# Altium PCB AuxBoard030624.PcbDoc
Units mm, origin at the board's own origin, x right, y up, seen from the top; angles counter-clockwise.
Board outline 193.93 x 90.42 mm, 2 copper layers (Top Layer, Bottom Layer); 177 components, 141 nets, 489 pads, 90 vias.
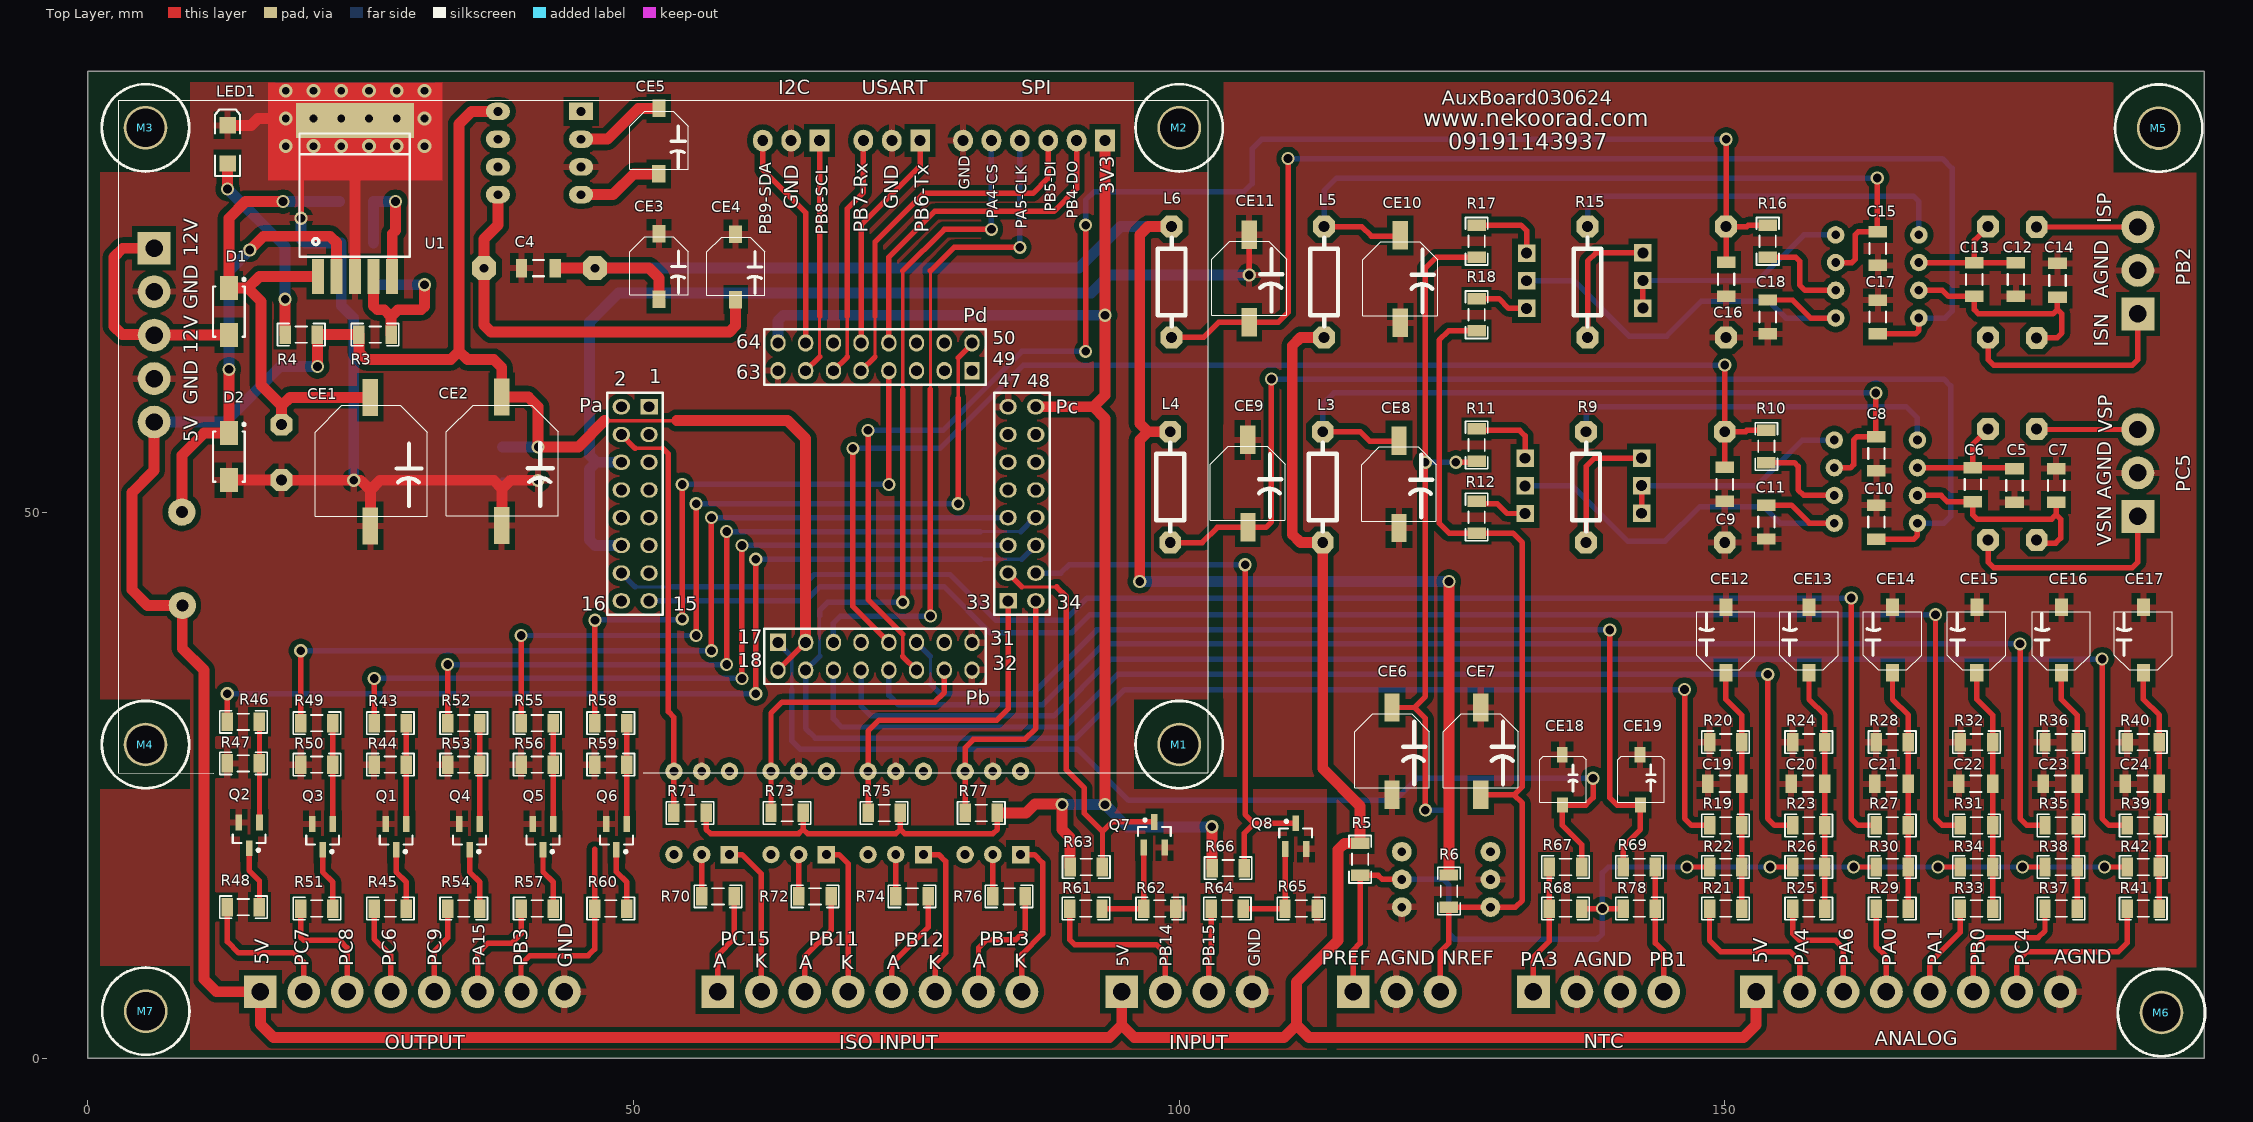
[diagram p0: Top Layer view]
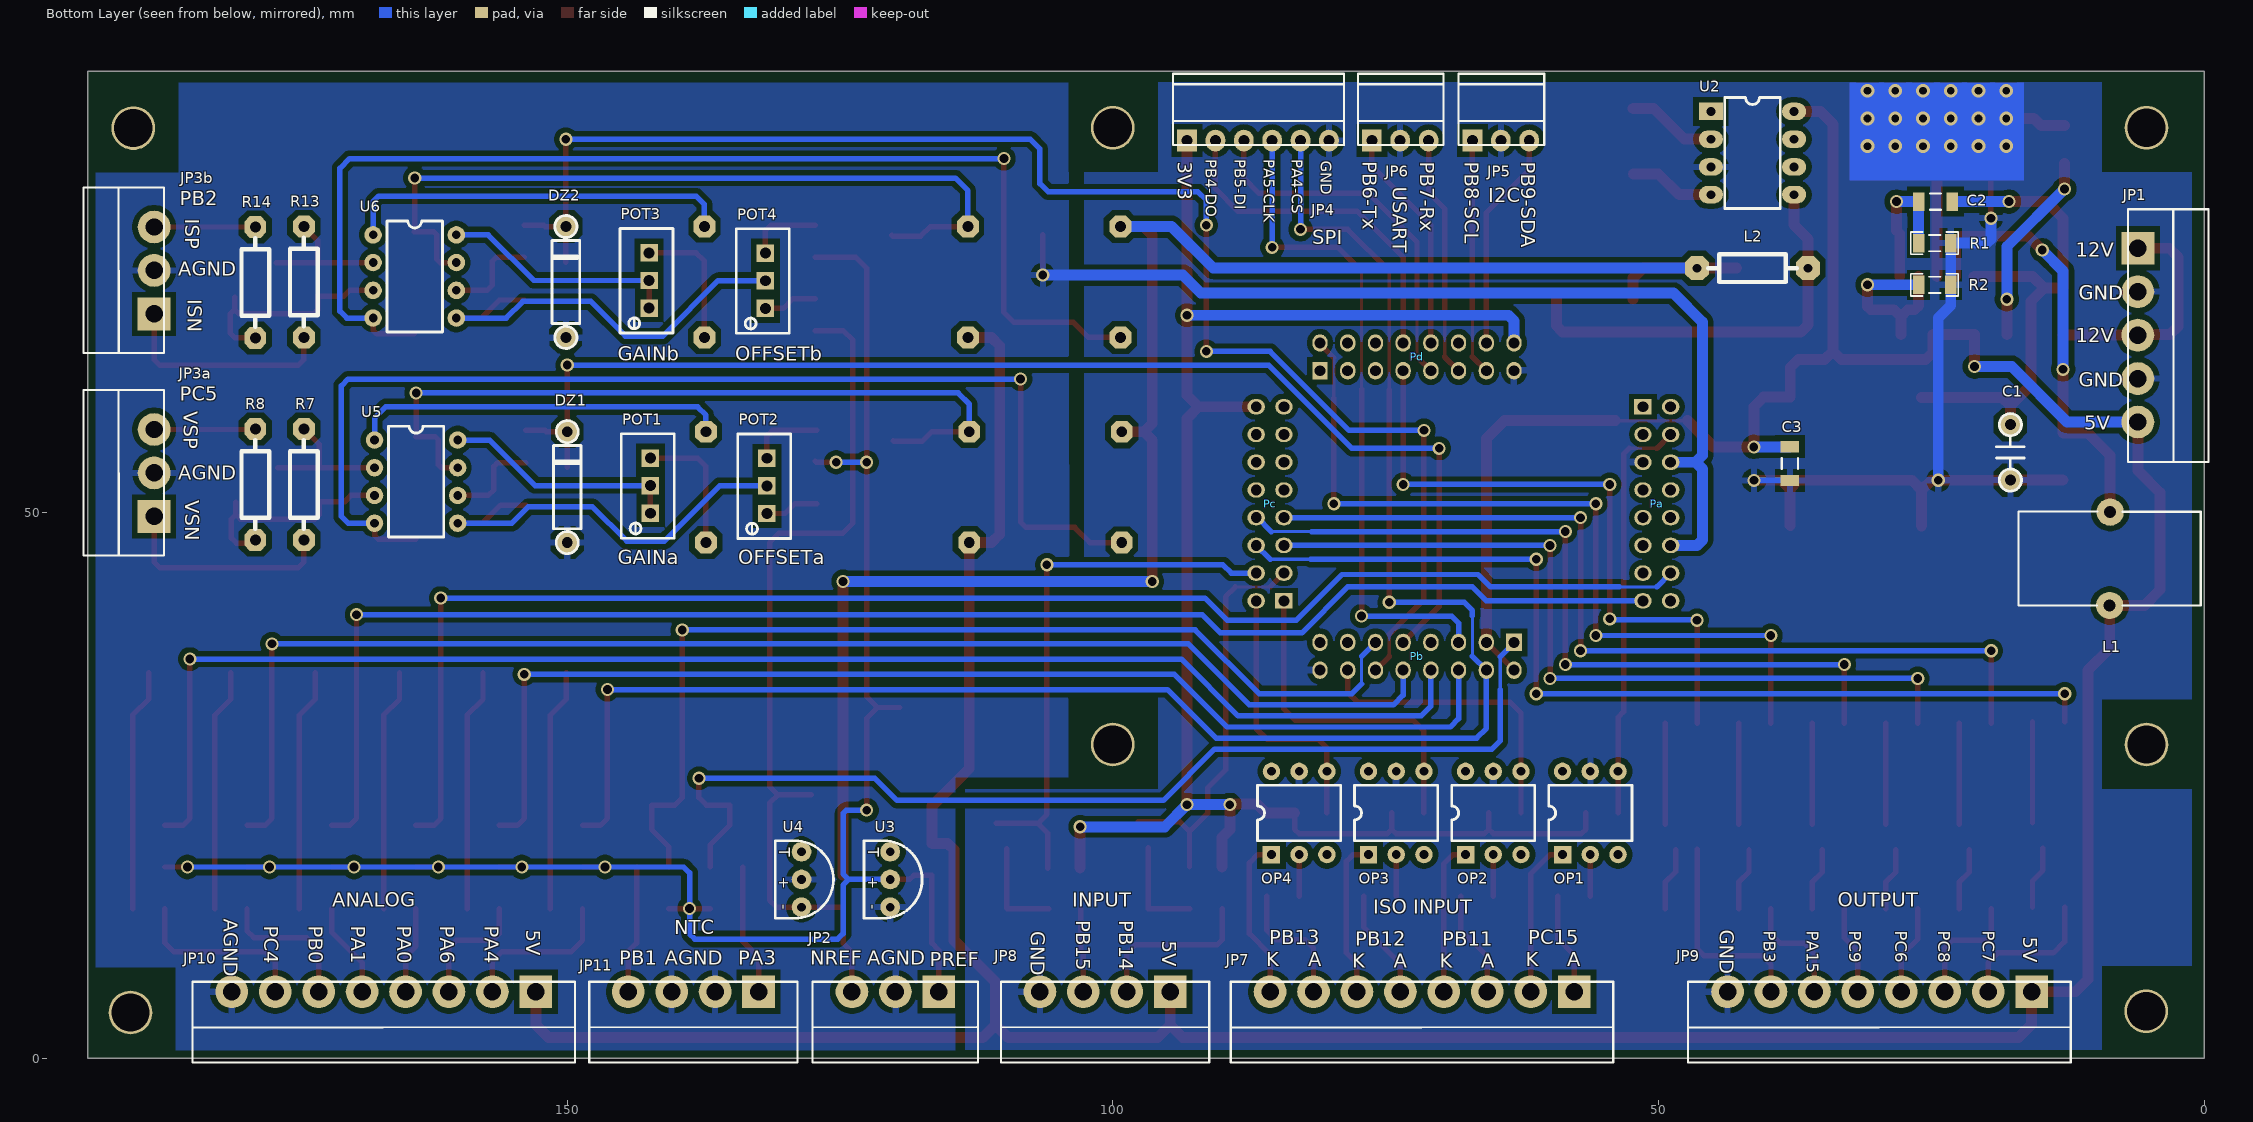
[diagram p1: Bottom Layer view, seen from below]
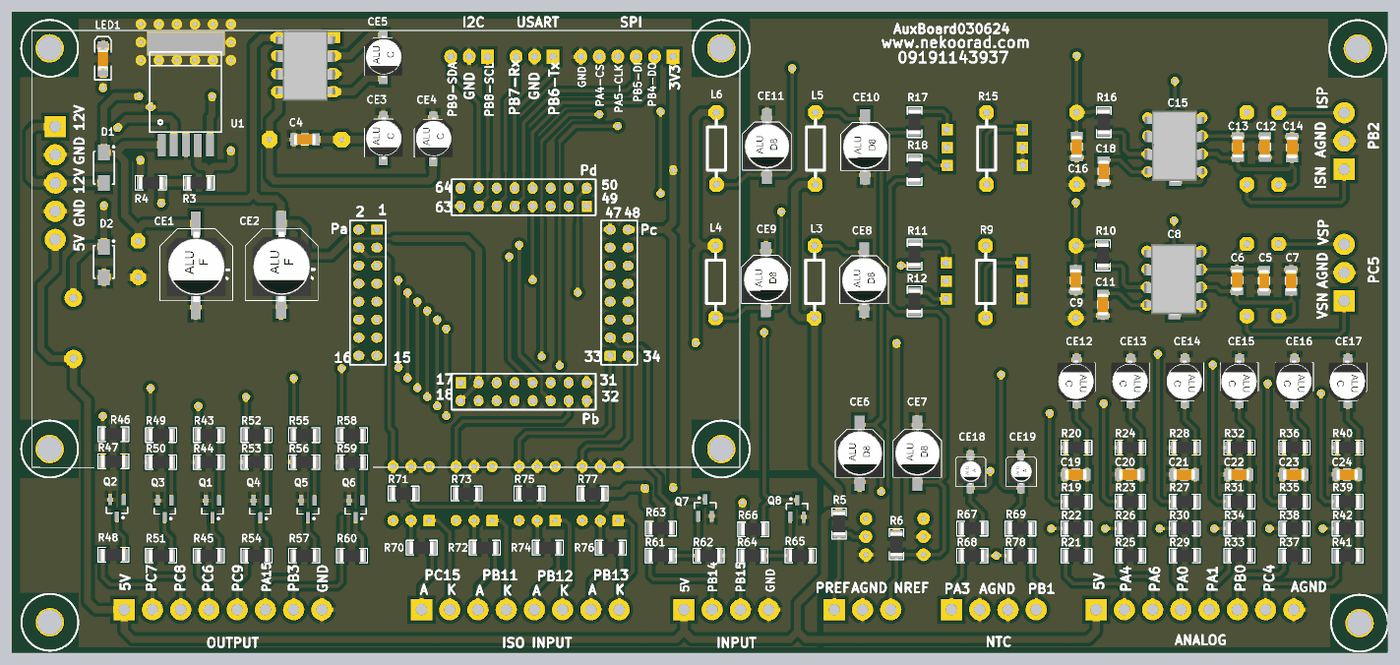
[diagram p2: 3D render of the assembled board from above, using the file's embedded part models]

## Layer stack, top to bottom
Top Solder: solder mask 0.0102, Solder Resist, Dk 3.5
Top Layer: signal copper 0.0356
Dielectric 1: dielectric 0.32, FR-4, Dk 4.8
Bottom Layer: signal copper 0.0356
Bottom Solder: solder mask 0.0102, Solder Resist, Dk 3.5

## Board outline
0,0 0,90.424 193.929,90.424 193.929,0

## Design rules (kind name [scope] priority, off if disabled: settings)
Clearance Poly [All vs InPolygon] p1: gap=0.5 ignorepadtopadclearanceinfootprint=FALSE
Clearance [All] p2: gap=0.4 ignorepadtopadclearanceinfootprint=FALSE
PlaneClearance [All] p1: clearance=0.5
PlaneConnect [All] p1: planeconnectstyle=Relief reliefexpansion=0.508 reliefentries=4 reliefconductorwidth=0.6 reliefairgap=0.5
PolygonConnect [All] p1: connectstyle=Relief reliefconductorwidth=0.6 reliefentries=4 polygonreliefangle="90 Angle" airgapwidth=0.5
RoutingVias [All] p1: holewidth=0.711 width=1.27 viastyle="Through Hole" minholewidth=0.711 minwidth=1.27 maxholewidth=0.711 maxwidth=1.27
SolderMaskExpansion [All] p1: expansion=0.102 istentingtop=FALSE
Width [All] p1: maxlimit=1 minlimit=0.2 preferedwidth=0.5 minimp=50.000000 maximp=50.000000 favimp=50.000000
28 further rules are at their usual default settings.

## Components (designator, comment, footprint, x,y, rotation, side; value= is the part's Value field where it differs from the comment)
C1 "100N" C2P 17.78,58.048 r270 bottom
C2 "100N" SMD_CAP_1206. 24.642,78.486 r0 bottom
C3 "100N" SMD_CAP_1206. 37.973,54.483 r270 bottom
C4 "100N" SMD_CAP_1206. 41.3,72.39 r180 top
C5 "1N" SMD_CAP_1206. 176.53,52.476 r270 top
C6 "10N" SMD_CAP_1206. 172.72,52.553 r270 top
C7 "1N" SMD_CAP_1206. 180.34,52.476 r90 top
C8 "100N" SMD_CAP_1206. 163.883,55.396 r90 top
C9 "100N" SMD_CAP_1206. 149.987,52.578 r270 top
C10 "100N" SMD_CAP_1206. 163.883,49.122 r90 top
C11 "100N" SMD_CAP_1206. 153.797,49.124 r270 top
C12 "1N" SMD_CAP_1206. 176.657,71.349 r270 top
C13 "10N" SMD_CAP_1206. 172.847,71.349 r270 top
C14 "1N" SMD_CAP_1206. 180.467,71.272 r90 top
C15 "100N" SMD_CAP_1206. 164.01,74.192 r90 top
C16 "100N" SMD_CAP_1206. 150.114,71.374 r270 top
C17 "100N" SMD_CAP_1206. 164.01,67.918 r90 top
C18 "100N" SMD_CAP_1206. 153.924,67.92 r270 top
C19 "ND" SMD_CAP_1206. 149.991,25.146 r180 top
C20 "ND" SMD_CAP_1206. 157.611,25.146 r180 top
C21 "ND" SMD_CAP_1206. 165.26,25.146 r180 top
C22 "ND" SMD_CAP_1206. 172.978,25.146 r180 top
C23 "ND" SMD_CAP_1206. 180.725,25.146 r180 top
C24 "ND" SMD_CAP_1206. 188.247,25.146 r180 top
CE1 "470M/25" CAP-E-6 26.068,51.018 r0 top
CE2 "1000M/16" CAP-E-6 38.1,51.054 r0 top
CE3 "10M/25" CAP-E-3 52.414,70.651 r0 top
CE4 "10M/25" CAP-E-3 59.436,70.612 r0 top
CE5 "10M/25" CAP-E-3 52.399,82.126 r0 top
CE6 "47M" CAP-E-4 119.507,25.84 r0 top
CE7 "47M" CAP-E-4 127.635,25.84 r0 top
CE8 "47M" CAP-E-4 120.142,50.292 r0 top
CE9 "47M" CAP-E-4 106.299,50.351 r0 top
CE10 "47M" CAP-E-4 120.269,69.088 r0 top
CE11 "47M" CAP-E-4 106.426,69.147 r0 top
CE12 "ND" CAP-E-3 150.02,40.206 r180 top
CE13 "ND" CAP-E-3 157.64,40.206 r180 top
CE14 "ND" CAP-E-3 165.289,40.206 r180 top
CE15 "ND" CAP-E-3 173.007,40.206 r180 top
CE16 "ND" CAP-E-3 180.754,40.206 r180 top
CE17 "ND" CAP-E-3 188.276,40.206 r180 top
CE18 "1M" CAP-E-2 135.189,24.423 r0 top
CE19 "1M" CAP-E-2 142.33,24.423 r0 top
D1 "schottky" SMA-M 12.954,68.403 r270 top
D2 "schottky" SMA-M 12.954,55.118 r270 top
DZ1 "3V" D4P 149.987,47.244 r270 bottom
DZ2 "3V" D4P 150.114,66.04 r270 bottom
JP1 "DC_SUP" "dsip 5 right" 6.096,66.253 r180 bottom
JP2 "Ref" "dsip 3 right" 123.952,6.096 r270 bottom
JP3a "V/A Signal" "dsip 3 right" 187.833,57.658 r0 bottom
JP3b "V/A Signal" "dsip 3 right" 187.833,76.21 r0 bottom
JP4 "SPI" "SIP 6 Right" 93.204,84.074 r270 bottom
JP5 "I2C" "SIP 3 Right" 67.107,83.947 r270 bottom
JP6 "UART" "SIP 3 Right" 76.327,83.947 r270 bottom
JP7 "ISO DIN" "dsip 8 right" 57.763,6.071 r270 bottom
JP8 "DIN" "dsip 4 right" 102.727,6.096 r270 bottom
JP9 "DOUT" "dsip 8 right" 15.853,6.071 r270 bottom
JP10 "Analog" "dsip 8 right" 152.886,6.071 r270 bottom
JP11 "NTC" "dsip 4 right" 140.444,6.096 r270 bottom
L1 "100UH" INDUCTOR-ylw 0.401,49.893 r0 bottom
L2 "100UH" r4p#1 36.322,72.39 r270 bottom
L3 "100UH" r4p#2 113.157,47.244 r180 top
L4 "100UH" r4p#2 99.187,57.404 r0 top
L5 "100UH" r4p#2 113.284,66.04 r180 top
L6 "100UH" r4p#2 99.314,76.2 r0 top
LED1 "Red" LED_SMD_1206 15.048,83.815 r90 top
M1 "Comment" Stud-hole 100.006,28.745 r0 top locked value=DNP/MH
M2 "Comment" Stud-hole 100.006,85.245 r0 top locked value=DNP/MH
M3 "Comment" Stud-hole 5.306,85.245 r0 top locked value=DNP/MH
M4 "Comment" Stud-hole 5.306,28.745 r0 top locked value=DNP/MH
M5 "Comment" Stud-hole 189.738,85.217 r0 top value=DNP/MH
M6 "Comment" Stud-hole 189.992,4.191 r0 top value=DNP/MH
M7 "Comment" Stud-hole 5.334,4.318 r0 top value=DNP/MH
OP1 "4N28" DIP6 58.801,18.669 r90 bottom
OP2 "4N28" DIP6 67.691,18.669 r90 bottom
OP3 "4N28" DIP6 76.581,18.669 r90 bottom
OP4 "4N28" DIP6 85.471,18.669 r90 bottom
Pa "Header 8X2" HDR2X8#1 51.435,59.69 r270 bottom locked
Pb "Header 8X2" HDR2X8#2 63.246,38.1 r0 bottom locked
Pc "Header 8X2" HDR2X8#1 84.328,41.91 r90 bottom locked
Pd "Header 8X2" HDR2X8#1 81.026,62.992 r180 bottom locked
POT1 "ND" "pot multi turn" 142.367,49.931 r180 bottom
POT2 "ND" "pot multi turn" 131.699,49.911 r180 bottom
POT3 "ND" "pot multi turn" 142.494,68.727 r180 bottom
POT4 "ND" "pot multi turn" 131.826,68.707 r180 bottom
Q1 "2N2222" 2N2222 28.36,21.988 r180 top
Q2 "2N2222" 2N2222 14.898,22.115 r180 top
Q3 "2N2222" 2N2222 21.629,21.988 r180 top
Q4 "2N2222" 2N2222 35.091,21.988 r180 top
Q5 "2N2222" 2N2222 41.822,21.988 r180 top
Q6 "2N2222" 2N2222 48.553,21.988 r180 top
Q7 "2N2222" 2N2222 97.624,18.779 r0 top
Q8 "2N2222" 2N2222 110.578,18.652 r0 top
R1 "10K%" RES_1206 24.68,73.795 r180 bottom
R2 "2K2%" RES_1206 24.68,69.985 r180 bottom
R3 "47K%" RES_1206 26.374,65.413 r0 top
R4 "4K7%" RES_1206 19.542,67.175 r180 top
R5 "270R" RES_1206 117.467,18.275 r90 top
R6 "270R" RES_1206 125.595,15.354 r90 top
R7 "10K%" R4P 174.117,47.498 r0 bottom
R8 "10K%" R4P 178.562,57.658 r180 bottom
R9 "ND" R4P 137.287,57.404 r0 top
R10 "1K%" RES_1206 152.916,56.02 r270 top
R11 "ND" RES_1206 128.135,56.219 r90 top
R12 "ND" RES_1206 126.373,49.543 r270 top
R13 "10K%" R4P 174.117,66.04 r0 bottom
R14 "10K%" R4P 178.562,76.159 r180 bottom
R15 "ND" R4P 137.414,76.2 r0 top
R16 "1K%" RES_1206 153.043,74.816 r270 top
R17 "ND" RES_1206 128.135,74.888 r90 top
R18 "ND" RES_1206 126.373,68.085 r270 top
R19 "1K%" RES_1206 150.101,20.455 r0 top
R20 "ND" RES_1206 150.101,28.075 r0 top
R21 "ND" RES_1206 150.029,14.597 r180 top
R22 "ND" RES_1206 150.101,16.645 r0 top
R23 "1K%" RES_1206 157.721,20.455 r0 top
R24 "ND" RES_1206 157.721,28.075 r0 top
R25 "ND" RES_1206 157.649,14.597 r180 top
R26 "ND" RES_1206 157.721,16.645 r0 top
R27 "1K%" RES_1206 165.37,20.455 r0 top
R28 "ND" RES_1206 165.37,28.075 r0 top
R29 "ND" RES_1206 165.298,14.597 r180 top
R30 "ND" RES_1206 165.37,16.645 r0 top
R31 "1K%" RES_1206 173.088,20.455 r0 top
R32 "ND" RES_1206 173.088,28.075 r0 top
R33 "ND" RES_1206 173.016,14.597 r180 top
R34 "ND" RES_1206 173.088,16.645 r0 top
R35 "1K%" RES_1206 180.835,20.455 r0 top
R36 "ND" RES_1206 180.835,28.075 r0 top
R37 "ND" RES_1206 180.763,14.597 r180 top
R38 "ND" RES_1206 180.835,16.645 r0 top
R39 "1K%" RES_1206 188.357,20.455 r0 top
R40 "ND" RES_1206 188.357,28.075 r0 top
R41 "ND" RES_1206 188.285,14.597 r180 top
R42 "ND" RES_1206 188.357,16.645 r0 top
R43 "4K7" RES_1206 27.771,29.824 r0 top
R44 "2K2" RES_1206 27.699,27.776 r180 top
R45 "ND" RES_1206 27.699,14.597 r180 top
R46 "4K7" RES_1206 14.309,29.951 r0 top
R47 "2K2" RES_1206 14.237,27.903 r180 top
R48 "ND" RES_1206 14.237,14.724 r180 top
R49 "4K7" RES_1206 21.04,29.824 r0 top
R50 "2K2" RES_1206 20.968,27.776 r180 top
R51 "ND" RES_1206 20.968,14.597 r180 top
R52 "4K7" RES_1206 34.502,29.824 r0 top
R53 "2K2" RES_1206 34.43,27.776 r180 top
R54 "ND" RES_1206 34.43,14.597 r180 top
R55 "4K7" RES_1206 41.233,29.824 r0 top
R56 "2K2" RES_1206 41.161,27.776 r180 top
R57 "ND" RES_1206 41.161,14.597 r180 top
R58 "4K7" RES_1206 47.964,29.824 r0 top
R59 "2K2" RES_1206 47.892,27.776 r180 top
R60 "ND" RES_1206 47.892,14.597 r180 top
R61 "10K" RES_1206 91.496,12.835 r0 top
R62 "4K7" RES_1206 98.256,12.835 r0 top
R63 "10K" RES_1206 91.525,16.645 r0 top
R64 "10K" RES_1206 104.45,12.835 r0 top
R65 "4K7" RES_1206 111.21,12.835 r0 top
R66 "10K" RES_1206 104.529,16.532 r0 top
R67 "10K" RES_1206 135.438,16.645 r0 top
R68 "5K" RES_1206 135.366,14.597 r180 top
R69 "10K" RES_1206 142.126,18.407 r180 top
R70 "1K%" RES_1206 57.714,15.726 r180 top
R71 "10K%" RES_1206 55.232,21.598 r0 top
R72 "1K%" RES_1206 66.604,15.726 r180 top
R73 "10K%" RES_1206 64.122,21.598 r0 top
R74 "1K%" RES_1206 75.494,15.726 r180 top
R75 "10K%" RES_1206 73.012,21.598 r0 top
R76 "1K%" RES_1206 84.384,15.726 r180 top
R77 "10K%" RES_1206 81.902,21.598 r0 top
R78 "5K" RES_1206 142.198,12.835 r0 top
U1 "LM2576T-ADJ" D2PACK_TO263-5 24.511,76.327 r0 top
U2 "ICL7662" DIP8#1 45.212,86.741 r180 bottom
U3 "LM336-2V5" lm336 120.396,13.843 r180 bottom
U4 "LM336-2V5" lm336 128.524,13.843 r180 bottom
U5 "AD620" DIP8#2 167.64,56.642 r180 bottom
U6 "AD620" DIP8#2 167.767,75.438 r180 bottom

## Footprints (in the part's own frame and the unit in brackets; to place one, negate y for a bottom-side part, rotate by r counter-clockwise, add the part's x,y. Pads: shape width x height; smd on the part's side, far side on the other; paste and mask are expansions set on the pad)
2N2222 [mm] "SOT_23"
  rect 0.6x1.45 smd: 1(-0.85,0.525) 2(1.05,0.525) 3(0.1,2.875)
  silkscreen extent -1.4,1.6 1.6,3.17, body extent -1.4,1 1.6,2.4, height 1.1
C2P [mm]
  oct 2x2 hole 1: 1(0,0) 2(5.08,0)
  silkscreen extent -1.02,-1.27 6.1,1.27
CAP-E-2 [mm] "1u-50v"
  rect 1x1.4 smd: 1(-0.09,3.39) 2(-0.075,-1.22)
  silkscreen extent -2.17,-0.98 2.11,3.25, body extent -1.68,-0.65 1.62,2.95, height 5.4
CAP-E-3 [mm] "22u-35v"
  rect 1.2x1.6 smd: 1(-0.065,4.9) 2(-0.075,-1.1)
  silkscreen extent -2.72,-0.69 2.62,4.62, body extent -2.64,-1.03 2.66,4.87, height 5.41
CAP-E-4 [mm] "(100u-35v)(47u-16v)(220u-16v)(100u-16v)(10u-50v)"
  rect 1.4x2.6 smd: 1(-0.005,6.3) 2(0,-1.71)
  silkscreen extent -3.43,-1.07 3.43,5.71, body extent -3.27,-1.22 3.33,5.78, height 7.7
CAP-E-6 [mm] "(220u-35v)(470u-25v)"
  rect 1.4x3.4 smd: 1(-0.16,9.535) 2(-0.16,-2.25)
  silkscreen extent -5.22,-1.35 5.03,8.79, body extent -4.24,-1.54 4.06,8.36, height 10.2
D2PACK_TO263-5 [mm]
  rect 1.1x3.2 smd: 1(-3.4,-4.7) 2(-1.7,-4.7) 3(0,-4.7) 4(1.7,-4.7) 5(3.4,-4.7)
  rect 10.8x3.2 smd: 3(0,9.6)
  silkscreen extent -5.1,-2.9 5,8.4, body extent -5.1,-4.62 5.06,9.62, height 4.87
D4P [mm]
  oct 2x2 hole 1: 1(0,0) 2(-10.16,0)
  silkscreen extent -11.18,-1.27 1.02,1.27
DIP6 [mm]
  rect 1.6x1.6 hole 0.8: 1(0,0)
  round 1.6 hole 0.8: 2(0,-2.54) 3(0,-5.08) 4(7.62,-5.08) 5(7.62,-2.54) 6(7.62,0)
  silkscreen extent 1.27,-6.35 6.35,1.27
DIP8#1 [mm]
  rect 2.2x1.6 hole 0.8: 1(0,0)
  oval 2.2x1.6 hole 0.8: 2(0,-2.54) 3(0,-5.08) 4(0,-7.62) 5(7.62,-7.62) 6(7.62,-5.08) 7(7.62,-2.54) 8(7.62,0)
  silkscreen extent 1.27,-8.89 6.35,1.27, body extent -1.42,-8.88 9.14,1.02, height 3.75
DIP8#2 [mm]
  round 1.6 hole 0.8: 1(0,0) 2(0,-2.54) 3(0,-5.08) 4(0,-7.62) 5(7.62,-7.62) 6(7.62,-5.08) 7(7.62,-2.54) 8(7.62,0)
  silkscreen extent 1.27,-8.89 6.35,1.27, body extent -1.42,-8.88 9.14,1.02, height 3.75
"dsip 3 right" [mm]
  rect 3x3 hole 1.6: 1(0,8.011)
  round 3 hole 1.6: 2(0,4.031) 3(0,0.051)
  silkscreen extent -0.91,-3.56 6.48,11.59
"dsip 4 right" [mm]
  rect 3x3 hole 1.6: 1(0,7.985)
  round 3 hole 1.6: 2(0,4.005) 3(0,0.025) 4(0,-3.955)
  silkscreen extent -0.91,-7.52 6.48,11.56
"dsip 5 right" [mm]
  rect 3x3 hole 1.6: 1(0,7.96)
  round 3 hole 1.6: 2(0,3.98) 3(0,0) 4(0,-3.98) 5(0,-7.96)
  silkscreen extent -0.91,-11.63 6.48,11.53
"dsip 8 right" [mm]
  rect 3x3 hole 1.6: 1(-0.025,0.025)
  round 3 hole 1.6: 2(-0.025,-3.955) 3(-0.025,-7.935) 4(-0.025,-11.915) 5(-0.025,-15.895) 6(-0.025,-19.875) 7(-0.025,-23.855) 8(-0.025,-27.835)
  silkscreen extent -0.94,-31.45 6.45,3.6
HDR2X8#1 [mm] "Connector; Header; 8x2 Position"
  rect 1.4x1.6 hole 1: 1(0,0)
  oval 1.4x1.6 hole 1: 2(0,2.54) 3(2.54,0) 4(2.54,2.54) 5(5.08,0) 6(5.08,2.54) 7(7.62,0) 8(7.62,2.54) 9(10.16,0) 10(10.16,2.54) 11(12.7,0) 12(12.7,2.54) 13(15.24,0) 14(15.24,2.54) 15(17.78,0) 16(17.78,2.54)
HDR2X8#2 [mm] "Connector; Header; 8x2 Position"
  rect 1.5x1.6 hole 1: 1(0,0)
  oval 1.4x1.6 hole 1: 2(0,2.54) 3(2.54,0) 4(2.54,2.54) 5(5.08,0) 6(5.08,2.54) 7(7.62,0) 8(7.62,2.54) 9(10.16,0) 10(10.16,2.54) 11(12.7,0) 12(12.7,2.54) 13(15.24,0) 14(15.24,2.54) 15(17.78,0) 16(17.78,2.54)
INDUCTOR-ylw [mm]
  round 2.5 hole 1.1: 1(8.275,8.405) 2(8.235,-0.145)
  silkscreen extent -0.07,-0.21 16.63,8.42
LED_SMD_1206 [mm] "SMD"
  rect 1.5x1.5 smd: 1(-1.844,2.221) 2(1.656,2.221)
  silkscreen extent -2.99,1.07 3.11,3.37, body extent -1.74,1.46 1.56,2.91, height 1.36
lm336 [mm]
  round 1.8 hole 0.8: 1(0,0) 2(0,2.54) 3(0,5.08)
  silkscreen extent -2.41,-1.02 2.92,6.1
"pot multi turn" [mm]
  rect 1.6x1.6 hole 1: 1(0,5.06) 2(0,0) 3(0,2.53)
  silkscreen extent -2.67,-2.29 2.18,7.29
r4p#1 [mm]
  oct 2.2x2.2 hole 0.8: 1(0,0) 2(0,-10.16)
  silkscreen extent -1.27,-9.14 1.27,-1.02
r4p#2 [mm]
  oct 2x2 hole 1: 1(0,0) 2(0,-10.16)
  silkscreen extent -1.27,-9.14 1.27,-1.02
R4P [mm]
  oct 2x2 hole 1: 1(0,0) 2(0,-10.16)
  silkscreen extent -1.27,-9.14 1.27,-1.02
RES_1206 [mm] "SMD"
  rect 1.05x1.7 smd: 1(-1.511,0.881) 2(1.439,0.881)
  silkscreen extent -2.21,-0.14 2.14,1.91, body extent -1.69,0.03 1.61,1.73, height 0.94
"SIP 3 Right" [mm]
  rect 2x1.8 hole 1: 1(-0.127,0.051)
  oval 2x1.8 hole 1: 2(-0.127,2.651) 3(-0.127,5.251)
  silkscreen extent -6.25,-1.22 0.28,6.63
"SIP 6 Right" [mm]
  rect 2x1.8 hole 1: 1(0,0)
  oval 2x1.8 hole 1: 2(0,2.6) 3(0,5.2) 4(0,7.8) 5(0,10.4) 6(0,13)
  silkscreen extent -6.12,-1.3 0.41,14.38
SMA-M [mm] "Molded Diode, 2-Leads, Body 4.30x2.70mm, IPC Low Density"
  rect 2.2x1.65 smd: 1(2.15,0) 2(-2.15,0)
  silkscreen extent -3.07,-1.45 2.3,1.5, body extent -2.3,-1.45 2.3,1.45, height 2.44
SMD_CAP_1206. [mm]
  rect 1.05x1.7 smd: 1(-1.549,0) 2(1.549,0)
  silkscreen extent -0.5,-0.75 0.5,0.75, body extent -1.52,-0.77 1.53,0.75, height 0.75
Stud-hole [mm]
  round 4 hole 3.5: 1(0,0)
  silkscreen extent -4,-4 4,4

## Part data
C1 C2 C3 C4 C5 C6 C7 C8 C9 C10 C11 C12 C13 C14 C15 C16 C17 C18 C19 C20 C21 C22 C23 C24: library part C
CE1 CE2 CE3 CE4 CE5 CE6 CE7 CE8 CE9 CE10 CE11 CE12 CE13 CE14 CE15 CE16 CE17 CE18 CE19: library part E
D1 D2: library part Diode, "Default Diode", Code_JEDEC=DO-214-AB, LatestRevisionDate=17-Jul-2002, LatestRevisionNote="Re-released for DXP Platform.", PackageDescription="DO-214-AB/SMC; 2 C-Bend Leads; Body 7.9 x 5.9 mm, inc. leads (LxW)", PackageReference=SMC, PackageVersion=Sep-1996, Published=8-Jun-2000, Publisher="Altium Limited"
DZ1 DZ2: library part Z
JP1: library part "HEADER 5"
JP2 JP3a JP3b JP5 JP6: library part "Header 3", "Header, 3-Pin", LatestRevisionDate=17-Jul-2002, LatestRevisionNote="Re-released for DXP Platform.", Publisher="Altium Limited"
JP4: library part "HEADER 6"
JP7 JP9 JP10: library part "HEADER 8"
JP8 JP11: library part "Header 4", "Header, 4-Pin", LatestRevisionDate=17-Jul-2002, LatestRevisionNote="Re-released for DXP Platform.", Publisher="Altium Limited"
L1 L2 L3 L4 L5 L6: library part "INDUCTOR IRON"
LED1: library part LED, "LED", Adding Date=1387/12/22, Color=Red, Designer="Saeid Jorablo", Organazation=ControTec, Size="SMD 1206"
M1 M2 M3 M4 M5 M6 M7: library part SCMH_M1P6, "SCREW mouting, M1.6, 1.6mm diameter and 3.2mm PanHead", ASSEMBLY=DNP
OP1 OP2 OP3 OP4: library part OPTODIP6
Pa Pb Pc Pd: "Header, 8-Pin, Dual row", LatestRevisionDate=17-Jul-2002, LatestRevisionNote="Re-released for DXP Platform.", Publisher="Altium Limited"
POT1 POT2 POT3 POT4: library part POT2
Q1 Q2 Q3 Q4 Q5 Q6 Q7 Q8: library part 1FW, "NPN", ComponentLink1Description=Datasheet, ComponentLink1URL=http://www.farnell.com/datasheets/1685012.pdf, DatasheetVersion=1997, LatestRevisionDate=15-Jan-2003, LatestRevisionNote="PCB Footprint 'BCY-W3/D4.7' replaced", PackageDescription="TO, Flat Index; 3 In-Line, Axial Leads; Body Dia. 4.5mm; Leads 0.51 x 0.48 mm (max)", PackageReference=TO-92A, PackageVersion=Sep-1998, Published=8-Jun-2000, Publisher="Altium Limited"
R1 R2 R3 R4 R5 R6 R7 R8 R9 R10 R11 R12 R13 R14 R15 R16 R17 R18 R19 R20 R21 R22 R23 R24 R25 R26 R27 R28 R29 R30 R31 R32 R33 R34 R35 R36 R37 R38 R39 R40 R41 R42 R43 R44 R45 R46 R47 R48 R49 R50 R51 R52 R53 R54 R55 R56 R57 R58 R59 R60 R61 R62 R63 R64 R65 R66 R67 R68 R69 R70 R71 R72 R73 R74 R75 R76 R77 R78: library part R
U1: library part LM2576
U3 U4: library part LM336

## Via types
v1: diameter 1.2, hole 0.8, Top Layer to Bottom Layer, 72 vias
v2: diameter 1.27, hole 0.711, Top Layer to Bottom Layer, 18 vias

## Nets (pads, with @x,y where several pads share a name; then routed paths per layer and width w, separated by ;. In a path a pad name is that pad's centre, name@x,y a point inside that pad or via, vN(x,y) a via of type N, cw(c..) or ccw(c..) an arc to the next point about the centre after c; other vN are vias at no path point)
3V3: JP4.1 Pc.16 Pd.16 R63.1 R66.1 R71.2 R73.2 R75.2 R77.2 | length 163.6
  Top Layer w0.5: R71.2 56.671,20.984 57.081,20.574 65.151,20.574 65.561,20.984 ; R73.2 65.561,20.984 ; R75.2 74.451,20.984 ; R77.2 83.341,20.984 82.931,20.574 74.861,20.574 74.451,20.984 ; v1@89.232,23.29 v1(89.281,23.241) ; v1(102.997,21.209) v1@103.008,21.198 ; R66.1@103.008,17.424 R66.1 ; 65.561,20.984 65.971,20.574 74.041,20.574 74.451,20.984
  Top Layer w1: R77.2 85.979,22.479 86.79,23.29 v1@89.232,23.29 ; Pc.16 92.149,59.69 ; v1(89.281,23.241) 89.281,20.955 90.014,20.222 R63.1 ; JP4.1 93.204,60.745 92.149,59.69 ; v1(93.218,23.241) 93.218,58.621 92.149,59.69 ; R66.1@103.008,17.424 v1@103.008,21.198
  Bottom Layer w1: Pd.16 63.246,67.564 63.754,68.072 v1(93.218,68.072) ; v1(89.281,23.241) v1(93.218,23.241) 95.25,21.209 v1(102.997,21.209)
5VN: C4.1 CE3.2 L2.2 L4.1 L6.1 R6.2 | length 159.1
  Top Layer w1: C4.1 L2.2 51.435,72.39 52.339,71.486 CE3.2 ; v1(96.393,43.688) 96.393,56.642 97.155,57.404 ; L4.1 97.155,57.404 ; L6.1 97.155,76.2 96.393,75.438 96.393,58.166 97.155,57.404 ; R6.2 v1(124.714,43.688)
  Bottom Layer w1: L2.2 90.805,72.39 94.615,76.2 L6.1 ; v1(96.393,43.688) v1(124.714,43.688)
5VP: C3.1 CE2.1 JP1.5 JP8.1 JP9.1 JP10.1 L1.1 L3.1 L5.1 Pb.2 Pb.3 R3.1 R4.1 R5.2 U2.8 | length 410.2
  Top Layer w0.3: 47.371,58.42 53.975,58.42
  Top Layer w0.5: Pb.2 Pb.3
  Top Layer w1: JP1.5 6.096,53.848 4.064,51.816 4.064,42.926 5.502,41.488 L1.1 8.676,37.552 10.668,35.56 10.668,7.239 11.811,6.096 JP9.1 15.828,3.095 17.018,1.905 93.599,1.905 94.742,3.048 ; v1(21.053,63.373) R4.1 R3.1 24.863,64.672 25.527,64.008 33.274,64.008 34.036,64.77 ; U2.8 35.179,86.741 34.036,85.598 34.036,64.77 ; 47.371,58.42 44.958,56.007 v1(41.275,56.007) 41.275,59.69 40.376,60.589 CE2.1 37.94,63.279 37.211,64.008 34.798,64.008 34.036,64.77 ; 53.975,58.42 64.135,58.42 65.786,56.769 Pb.3 ; JP8.1 94.742,3.048 ; L5.1 111.125,66.04 110.363,65.278 110.363,48.006 111.125,47.244 L3.1 113.157,26.543 116.586,23.114 R5.2 116.561,19.689 115.14,19.689 114.554,19.103 114.554,10.795 110.744,6.985 110.744,3.048 ; JP10.1 152.861,3.048 151.718,1.905 111.887,1.905 110.744,3.048 ; 94.742,3.048 95.885,1.905 109.601,1.905 110.744,3.048
  Bottom Layer w0.5: C3.1@37.973,55.905 C3.1@37.998,55.88
  Bottom Layer w1: JP1.5@6.223,58.42 JP1.5 12.573,58.293 17.653,63.373 v1(21.053,63.373) ; C3.1@37.998,56.007 v1(41.275,56.007)
11V: C1.1 C2.1 CE1.1 D1.2 U1.1 | length 48
  Top Layer w1: C1.1 17.78,59.791 ; v1(17.907,78.486) 14.478,78.486 12.954,76.962 D1.2 14.673,70.553 ; U1.1 15.747,71.627 14.673,70.553 ; CE1.1 18.542,60.553 17.78,59.791 ; 14.673,70.553 15.875,69.351 15.875,61.696 17.78,59.791
  Bottom Layer w1: v1(17.907,78.486) C2.1
12V: D1.1 JP1.1 JP1.3 | length 21.2
  Top Layer w1: JP1.1 3.22,74.213 2.413,73.406 2.413,67.056 3.175,66.294 6.055,66.294 JP1.3 D1.1
+INa: C6.2 C7.1 R8.2 U5.3 | length 20.4
  Top Layer w0.5: U5.3 169.799,51.562 170.358,51.003 C6.2 172.72,49.784 173.101,49.403 179.93,49.403 180.34,49.813 ; R8.2@178.435,47.203 180.299,47.203 180.75,47.654 180.75,49.403 180.34,49.813 ; C7.1 180.34,49.813
+INb: C13.2 C14.1 R14.2 U6.3 | length 20.4
  Top Layer w0.5: U6.3 169.926,70.358 170.485,69.799 C13.2 172.847,68.58 173.228,68.199 180.057,68.199 180.467,68.609 ; R14.2 180.426,65.999 180.877,66.45 180.877,68.199 180.467,68.609 ; C14.1 180.467,68.609
+VSa: C8.2 CE8.1 L3.2 U5.7 | length 71.4
  Top Layer w0.5: L3.2 116.586,57.404 117.475,56.515 120.06,56.515 CE8.1 ; U5.7 161.505,54.102 161.798,54.395 161.798,56.642 162.101,56.945 C8.2 163.83,56.998 v1(163.83,60.96)
  Bottom Layer w0.5: L3.2 113.157,59.944 114.173,60.96 v1(163.83,60.96)
+VSb: C15.2 CE10.1 L5.2 U6.7 | length 73.1
  Top Layer w0.5: L5.2 116.713,76.2 117.602,75.311 120.187,75.311 CE10.1 ; U6.7 161.632,72.898 161.925,73.191 161.925,75.438 162.228,75.741 C15.2 163.957,75.794 v1(163.957,80.645)
  Bottom Layer w0.5: L5.2 113.285,79.503 114.427,80.645 v1(163.957,80.645)
-INa: C5.1 C6.1 R7.2 U5.2 | length 13
  Top Layer w0.5: U5.2 C6.1 ; R7.2 172.72,56.261 C6.1 ; C5.1@176.53,54.102 C6.1
-INb: C12.1 C13.1 R13.2 U6.2 | length 12.7
  Top Layer w0.5: U6.2 C13.1 ; R13.2 172.847,74.93 C13.1 ; C12.1 C13.1
-VSa: C10.1 CE9.2 L4.2 U5.4 | length 105.9
  Top Layer w0.5: L4.2 102.108,47.244 103.505,48.641 CE9.2 107.95,48.641 108.458,49.149 v1(108.458,62.23) ; C10.1 167.311,47.573 167.64,47.901 U5.4
  Bottom Layer w0.5: v1(108.458,62.23) 170.053,62.23 170.688,61.595 170.688,49.657 170.053,49.022 U5.4
-VSb: C17.1 CE11.2 L6.2 U6.4 | length 108.3
  Top Layer w0.5: L6.2 102.235,66.04 103.632,67.437 CE11.2 109.093,67.437 109.982,68.326 v1(109.982,82.423) ; C17.1 167.438,66.369 167.767,66.697 U6.4
  Bottom Layer w0.5: v1(109.982,82.423) 169.926,82.423 170.815,81.534 170.815,68.453 170.18,67.818 U6.4
ADC1-EXTI15: OP1.4 Pa.4 R71.1 | length 38.2
  Top Layer w0.3: 50.165,55.88 52.705,55.88
  Top Layer w0.5: Pa.4 50.165,55.88 ; 52.705,55.88 53.213,55.372 53.213,31.75 53.721,31.242 OP1.4 R71.1
ADC1-IN1: Pa.14 R27.1 | length 139
  Top Layer w0.5: v1(161.573,42.164) 161.573,21.971 162.208,21.336 R27.1
  Bottom Layer w0.3: 50.165,43.18 53.594,43.18
  Bottom Layer w0.5: Pa.14 50.165,43.18 ; 53.594,43.18 65.405,43.18 66.548,44.323 78.994,44.323 83.185,40.132 89.535,40.132 91.567,42.164 v1@161.544,42.164
ADC1-IN2: Pa.15 R31.1 | length 142
  Top Layer w0.5: v1(169.291,40.64) 169.291,21.971 169.926,21.336 R31.1
  Bottom Layer w0.5: Pa.15 65.786,41.91 67.056,43.18 78.486,43.18 82.688,38.978 90.159,38.978 91.821,40.64 v1(169.291,40.64)
ADC1-IN4: CE18.2 Pb.1 R67.2 | length 97.3
  Top Layer w0.5: R67.2 136.877,19.587 135.114,21.35 CE18.2 137.249,23.203 137.922,23.876 v1(137.922,25.654)
  Bottom Layer w0.3: 64.516,33.782 64.516,36.78
  Bottom Layer w0.5: Pb.1@63.246,38.05 64.516,36.78 ; 64.516,33.782 64.516,29.083 65.278,28.321 90.678,28.321 95.377,23.622 119.761,23.622 121.793,25.654 v1(137.922,25.654)
ADC1-IN11: Pb.10 R35.1 | length 127.2
  Top Layer w0.5: v1(177.038,37.973) 177.038,21.971 177.673,21.336 R35.1
  Bottom Layer w0.5: Pb.10 73.406,33.274 74.295,32.385 87.503,32.385 93.091,37.973 v1(177.038,37.973)
ADC1-IN12: CE19.2 Pb.11 R69.2 | length 94.1
  Top Layer w0.5: v1(139.447,39.243) 139.447,23.876 140.12,23.203 CE19.2 142.255,20.97 140.687,19.402 R69.2
  Bottom Layer w0.3: 77.216,34.29 77.216,36.83
  Bottom Layer w0.5: Pb.11 77.216,36.83 ; 77.216,34.29 78.105,33.401 86.614,33.401 92.456,39.243 v1(139.447,39.243)
ADC2-EXTI11: OP2.4 Pb.14 R73.1 | length 27.8
  Top Layer w0.5: R73.1 OP2.4 62.611,31.623 63.627,32.639 77.597,32.639 78.486,33.528 Pb.14
ADC2-IN5: Pb.8 R39.1 | length 136.7
  Top Layer w0.5: v1(184.56,36.576) 184.56,21.971 185.195,21.336 R39.1
  Bottom Layer w0.5: Pb.8 70.866,32.258 71.755,31.369 88.519,31.369 93.726,36.576 v1(184.56,36.576)
ADC2-IN11: C9.1 DZ1.2 Pb.9 R10.1 | length 115.4
  Top Layer w0.5: v1(70.104,55.88) 70.104,41.402 Pb.9 ; C9.1 DZ1.2 ; v1@149.987,63.5 DZ1.2 ; R10.1 152.019,57.531 151.892,57.404 DZ1.2
  Bottom Layer w0.5: v1(70.104,55.88) 78.105,55.88 85.736,63.511 v1(149.987,63.511)
ADC2-IN12: C16.1 DZ2.2 Pb.12 R16.1 | length 138.6
  Top Layer w0.3: 74.676,36.83 74.676,38.862
  Top Layer w0.5: v1(71.501,57.531) 71.501,42.037 74.676,38.862 ; 74.676,36.83 Pb.12 ; v1(91.44,64.77) v1(91.44,76.327) ; C16.1 DZ2.2 ; v1(150.114,84.201) DZ2.2 ; R16.1 152.146,76.327 152.019,76.2 DZ2.2
  Bottom Layer w0.5: v1(71.501,57.531) 78.359,57.531 85.598,64.77 v1(91.44,64.77) ; v1(91.44,76.327) 91.44,78.613 92.202,79.375 105.918,79.375 106.68,80.137 106.68,83.312 107.569,84.201 v1(150.114,84.201)
AGND: C5.2 C7.2 C8.1 C9.2 C10.2 C11.2 C12.2 C14.2 C15.1 C16.2 C17.2 C18.2 C19.2 C20.2 C21.2 C22.2 C23.2 C24.2 CE6.2 CE7.1 CE8.2 CE9.1 CE10.2 CE11.1 CE12.2 CE13.2 CE14.2 CE15.2 CE16.2 CE17.2 CE18.1 CE19.1 DZ1.1 DZ2.1 JP2.2 JP3a.2 JP3b.2 JP10.8 JP11.2 JP11.3 Pa.6 Pa.12 R20.1 R24.1 R28.1 R32.1 R36.1 R40.1 U3.1 U4.2 | length 91.8
  Top Layer w0.5: v1(106.421,71.755) CE11.1
  Bottom Layer w1: Pa.12 46.482,46.99 45.974,47.498 45.974,53.975 46.609,54.61 ; Pa.6 46.609,54.61 ; v1@106.426,71.755 93.599,71.755 91.948,70.104 48.641,70.104 45.974,67.437 45.974,55.245 46.609,54.61
AIO1: JP10.2 R21.2 | length 14.8
  Top Layer w0.5: R21.2 148.59,10.795 149.606,9.779 155.956,9.779 156.841,8.894 JP10.2
AIO2: JP10.3 R25.2 | length 11.5
  Top Layer w0.5: R25.2 156.21,11.43 156.845,10.795 160.147,10.795 160.821,10.121 JP10.3
AIO3: JP10.4 R29.2 | length 8
  Top Layer w0.5: R29.2 163.859,10.258 164.801,9.316 JP10.4
AIO4: JP10.5 R33.2 | length 8.8
  Top Layer w0.5: JP10.5 168.781,8.761 171.577,11.557 R33.2
AIO5: JP10.6 R37.2 | length 13.2
  Top Layer w0.5: JP10.6 172.761,9.947 173.863,11.049 178.689,11.049 179.324,11.684 R37.2
AIO6: JP10.7 R41.2 | length 16.7
  Top Layer w0.5: JP10.7 176.741,8.847 177.673,9.779 186.055,9.779 186.846,10.57 R41.2
BKL: Pa.2
Buzzer: Pb.13
DAC1-OUT1: JP4.5 Pb.4 R19.1 | length 164.5
  Top Layer w0.3: 74.676,61.245 74.676,72.136
  Top Layer w0.5: v1(74.676,41.783) 74.676,61.245 ; 74.676,72.136 78.486,75.946 v1(82.804,75.946) ; v1(146.304,33.782) 146.304,21.971 146.939,21.336 R19.1
  Bottom Layer w0.3: 67.056,36.83 67.056,40.54
  Bottom Layer w0.5: 67.056,36.83 Pb.4 65.786,30.226 66.675,29.337 90.551,29.337 94.996,33.782 v1(146.304,33.782) ; 67.056,40.54 67.056,41.021 67.818,41.783 v1(74.676,41.783) ; v1(82.804,75.946) JP4.5
DAC2-OUT1: Pb.6 R23.1 | length 108.1
  Top Layer w0.5: v1(153.924,35.179) 153.924,21.971 154.559,21.336 R23.1
  Bottom Layer w0.5: Pb.6 68.326,31.115 69.088,30.353 89.535,30.353 94.361,35.179 v1(153.924,35.179)
EN: Pa.16
GND: C1.2 C3.2 C4.2 CE1.2 CE2.2 CE3.1 CE4.1 D2.1 JP1.2 JP1.4 JP4.6 JP5.2 JP6.2 JP8.4 JP9.8 LED1.2 OP1.5 OP2.5 OP3.5 OP4.5 Pa.5 Pb.15 Pb.16 Pc.15 Pd.15 Q1.2 Q2.2 Q3.2 Q4.2 Q5.2 Q6.2 Q7.2 Q8.2 R1.2 R2.2 R44.2 R47.2 R50.2 R53.2 R56.2 R59.2 R62.2 R65.2 U1.3 U2.3 | length 94.6
  Top Layer w0.5: v1(19.558,76.962) 19.558,82.423 v2(20.701,83.566)
  Top Layer w1: LED1.2 14.986,85.471 15.621,86.106 v2(18.161,86.106) ; D2.1 C1.2 ; C1.2@17.78,52.959 v1(24.384,52.959) 25.019,52.959 25.908,52.07 ; U1.3@24.511,71.627 U1.3@24.511,85.927 ; CE1.2 25.908,52.07 ; CE2.2 37.973,48.837 37.973,52.197 ; v1@41.275,52.959 38.735,52.959 37.973,52.197 ; 25.908,52.07 26.797,52.959 37.211,52.959 37.973,52.197
  Bottom Layer w0.5: C3.2@37.973,52.807 C3.2@37.986,52.819 ; C3.2@37.986,52.946 v1(41.262,52.946)
  Bottom Layer w1: v1(19.558,76.962) 19.558,75.057 19.939,74.676 R1.2 R2.2 23.241,68.961 24.384,67.818 v1(24.384,52.959)
  other v2: 18.161,83.566 23.241,83.566 25.781,83.566 28.321,83.566 30.861,83.566 20.701,86.106 23.241,86.106 25.781,86.106 28.321,86.106 30.861,86.106 18.161,88.646 20.701,88.646 23.241,88.646 25.781,88.646 28.321,88.646 30.861,88.646
I2C1-SCL: JP5.1 Pd.13 | length 21.6
  Top Layer w0.3: 67.056,64.262 67.056,67.972
  Top Layer w0.5: Pd.13 67.056,64.262 ; 67.056,67.972 JP5.1
I2C1-SDA: JP5.3 Pd.14 | length 20.2
  Top Layer w0.5: JP5.3 61.856,81.4 65.786,77.47 Pd.14
ISN: JP3b.1 R13.1 | length 20.4
  Top Layer w0.5: R13.1 174.117,64.008 174.625,63.5 187.325,63.5 187.833,64.008 JP3b.1
ISP: JP3b.3 R14.1 | length 9.3
  Top Layer w0.5: R14.1 JP3b.3
K-R-A: Pc.9
K-R-B: Pc.10
KEY3-R: Pc.11
KEY4: Pc.12
KEY5: Pc.13
KEY6: Pa.3
LCD-D4: Pa.8
LCD-D5: Pa.9
LCD-D6: Pa.10
LCD-D7: Pa.11
LED1: Pd.3
LED2: Pd.4
LED3: Pd.5
LED4: Pd.6
NetC2_2: C2.2 R1.1 U1.5 | length 12.8
  Top Layer w1: U1.5 27.911,75.536 28.201,75.826 v1(28.201,78.486)
  Bottom Layer w1: R1.1 C2.2 v1(28.201,78.486)
NetC19_1: C19.1 CE12.1 R19.2 R20.2 R21.1 R22.2 | length 22.2
  Top Layer w0.5: CE12.1 150.085,32.893 151.54,31.438 R20.2 C19.1 R19.2 R22.2 R21.1
NetC20_1: C20.1 CE13.1 R23.2 R24.2 R25.1 R26.2 | length 22.2
  Top Layer w0.5: CE13.1 157.705,32.893 159.16,31.438 R24.2 C20.1 R23.2 R26.2 R25.1
NetC21_1: C21.1 CE14.1 R27.2 R28.2 R29.1 R30.2 | length 22.2
  Top Layer w0.5: CE14.1 165.354,32.893 166.809,31.438 R28.2 C21.1 R27.2 R30.2 R29.1
NetC22_1: C22.1 CE15.1 R31.2 R32.2 R33.1 R34.2 | length 22.2
  Top Layer w0.5: CE15.1 173.072,32.893 174.527,31.438 R32.2 C22.1 R31.2 R34.2 R33.1
NetC23_1: C23.1 CE16.1 R35.2 R36.2 R37.1 R38.2 | length 22.2
  Top Layer w0.5: CE16.1 180.819,32.893 182.274,31.438 R36.2 C23.1 R35.2 R38.2 R37.1
NetC24_1: C24.1 CE17.1 R39.2 R40.2 R41.1 R42.2 | length 22.2
  Top Layer w0.5: CE17.1 188.341,32.893 189.796,31.438 R40.2 C24.1 R39.2 R42.2 R41.1
NetCE4_2: CE4.2 L2.1 U2.5 | length 38.4
  Top Layer w1: U2.5 37.592,76.327 36.322,75.057 L2.1 36.322,67.183 36.957,66.548 58.801,66.548 59.361,67.108 CE4.2
NetCE5_1: CE5.1 U2.2 | length 8.3
  Top Layer w1: U2.2 47.625,84.201 50.45,87.026 CE5.1
NetCE5_2: CE5.2 U2.4 | length 7.9
  Top Layer w1: U2.4 48.133,79.121 50.038,81.026 CE5.2
NetD2_2: D2.2 L1.2 U1.2 | length 39.7
  Top Layer w1: L1.2 8.636,55.245 10.659,57.268 D2.2 v1(12.954,63.119) ; v1(14.859,74.041) 16.129,75.311 22.225,75.311 22.811,74.725 U1.2
  Bottom Layer w1: v1(12.954,63.119) 12.954,72.136 v1(14.859,74.041)
NetLED1_1: LED1.1 R4.2 | length 17.9
  Top Layer w1: v1(12.827,79.629) LED1.1 ; R4.2 v1(18.103,69.538)
  Bottom Layer w1: v1(12.827,79.629) 18.103,74.353 v1(18.103,69.538)
NetOP1_2: OP1.2 R70.2 | length 3.8
  Top Layer w0.5: R70.2 OP1.2@56.275,18.655
NetOP2_2: OP2.2 R72.2 | length 3.8
  Top Layer w0.5: R72.2 OP2.2@65.165,18.655
NetOP3_2: OP3.2 R74.2 | length 3.8
  Top Layer w0.5: R74.2 OP3.2@74.055,18.655
NetOP4_2: OP4.2 R76.2 | length 3.8
  Top Layer w0.5: R76.2 OP4.2@82.945,18.655
NetPOT1_1: POT1.1 R9.2 | length 12.4
  Top Layer w0.5: R9.2 137.287,54.229 138.049,54.991 POT1.1
NetPOT2_1: POT2.1 R11.2 | length 6.8
  Top Layer w0.5: R11.2@127.127,57.531 131.191,57.531 131.699,57.023 POT2.1
NetPOT2_2: POT2.2 R12.1 | length 4.9
  Top Layer w0.5: R12.1@127.127,50.8 129.159,50.8 130.048,49.911 POT2.2
NetPOT3_1: POT3.1 R15.2 | length 12.4
  Top Layer w0.5: R15.2 137.414,73.025 138.176,73.787 POT3.1
NetPOT4_1: POT4.1 R17.2 | length 6.8
  Top Layer w0.5: R17.2 131.318,76.327 131.826,75.819 POT4.1
NetPOT4_2: POT4.2 R18.1 | length 4.9
  Top Layer w0.5: R18.1 129.286,69.596 130.175,68.707 POT4.2
NetQ1_1: Q1.1 R43.2 R44.1 | length 9.2
  Top Layer w0.5: Q1.1 R44.1 R43.2
NetQ1_3: Q1.3 R45.1 | length 5.8
  Top Layer w0.5: Q1.3 28.26,17.079 29.21,16.129 R45.1
NetQ2_1: Q2.1 R46.2 R47.1 | length 9.2
  Top Layer w0.5: Q2.1 R47.1 R46.2
NetQ2_3: Q2.3 R48.1 | length 5.8
  Top Layer w0.5: Q2.3 14.798,17.206 15.748,16.256 R48.1
NetQ3_1: Q3.1 R49.2 R50.1 | length 9.2
  Top Layer w0.5: Q3.1 R50.1 R49.2
NetQ3_3: Q3.3 R51.1 | length 5.8
  Top Layer w0.5: Q3.3 21.529,17.079 22.479,16.129 R51.1
NetQ4_1: Q4.1 R52.2 R53.1 | length 9.2
  Top Layer w0.5: Q4.1 R53.1 R52.2
NetQ4_3: Q4.3 R54.1 | length 5.8
  Top Layer w0.5: Q4.3 34.991,17.079 35.941,16.129 R54.1
NetQ5_1: Q5.1 R55.2 R56.1 | length 9.2
  Top Layer w0.5: Q5.1 R56.1 R55.2
NetQ5_3: Q5.3 R57.1 | length 5.8
  Top Layer w0.5: Q5.3 41.722,17.079 42.672,16.129 R57.1
NetQ6_1: Q6.1 R58.2 R59.1 | length 9.2
  Top Layer w0.5: Q6.1 R59.1 R58.2
NetQ6_3: Q6.3 R60.1 | length 5.8
  Top Layer w0.5: Q6.3 48.453,17.079 49.403,16.129 R60.1
NetQ7_1: Q7.1 R61.2 R62.1 | length 9.4
  Top Layer w0.5: R61.2 R62.1 96.76,13.731 96.76,19.29 Q7.1
NetQ8_1: Q8.1 R64.2 R65.1 | length 9.3
  Top Layer w0.5: R64.2 R65.1 109.713,13.73 109.713,19.162 Q8.1
NetR2_1: R2.1 R3.2 U1.4 | length 16.5
  Top Layer w1: U1.4 26.211,68.912 26.543,68.58 27.178,68.58 27.813,67.945 ; R3.2 27.813,67.945 ; v1(30.861,70.866) 30.861,68.873 30.568,68.58 28.448,68.58 27.813,67.945
  Bottom Layer w1: R2.1 v1(30.861,70.866)
NetR10_2: R10.2 U5.6 | length 8.7
  Top Layer w0.5: R10.2 156.366,54.581 156.718,54.229 156.718,52.07 157.226,51.562 U5.6
NetR16_2: R16.2 U6.6 | length 8.7
  Top Layer w0.5: R16.2 156.493,73.377 156.845,73.025 156.845,70.866 157.353,70.358 U6.6
NREF: CE7.2 JP2.3 R6.1 R12.2 R18.2 U4.1 | length 80.4
  Top Layer w0.5: JP2.3 123.901,9.728 124.714,10.541 R6.1 U4.1 130.81,13.843 131.445,14.478 131.445,23.368 130.683,24.13 ; R18.2 124.685,66.646 123.825,65.786 123.825,49.022 124.743,48.104 R12.2 130.585,48.104 131.445,47.244 131.445,24.892 130.683,24.13 ; CE7.2 130.683,24.13
NTC1: JP11.1 R67.1 R68.2 | length 12
  Top Layer w0.5: JP11.1 132.459,9.269 133.927,10.737 R68.2 R67.1
NTC2: JP11.4 R69.1 R78.2 | length 11.7
  Top Layer w0.5: R69.1 R78.2 143.637,10.541 144.399,9.779 JP11.4
OP1A: JP7.1 R70.1 | length 9.4
  Top Layer w0.5: JP7.1 57.738,9.478 59.225,10.965 R70.1
OP1K: JP7.2 OP1.1 | length 14.5
  Top Layer w0.5: OP1.1 59.944,18.669 61.718,16.895 JP7.2
OP2A: JP7.3 R72.1 | length 9.7
  Top Layer w0.5: JP7.3 65.698,9.31 68.115,11.727 R72.1
OP2K: JP7.4 OP2.1 | length 14.1
  Top Layer w0.5: OP2.1 68.834,18.669 69.678,17.825 JP7.4
OP3A: JP7.5 R74.1 | length 10.1
  Top Layer w0.5: JP7.5 73.658,8.634 77.005,11.981 R74.1
OP3K: JP7.6 OP3.1 | length 14.6
  Top Layer w0.5: OP3.1 77.978,18.669 78.613,18.034 78.613,9.652 77.638,8.677 JP7.6
OP4A: JP7.7 R76.1 | length 12.1
  Top Layer w0.5: JP7.7 81.618,10.117 82.38,10.879 85.047,10.879 85.895,11.727 R76.1
OP4K: JP7.8 OP4.1 | length 14.9
  Top Layer w0.5: OP4.1 86.741,18.669 87.503,17.907 87.503,11.43 85.598,9.525 JP7.8
PA15: Pd.2 R55.1 | length 75.3
  Top Layer w0.3: 79.756,60.452 79.756,64.162
  Top Layer w0.5: R55.1 v1(39.722,38.735) ; v1(55.753,38.735) v1(55.753,50.8) ; v1(79.756,50.8) 79.756,60.452 ; 79.756,64.162 Pd.2@81.026,65.432
  Bottom Layer w0.5: v1(39.722,38.735) v1(55.753,38.735) ; v1(55.753,50.8) v1(79.756,50.8)
PB3: Pd.7 R58.1 | length 59.1
  Top Layer w0.5: R58.1 46.468,30.72 46.468,40.118 v1(46.482,40.132) ; v1(54.483,40.259) v1(54.483,52.578) ; v1(73.406,52.578) Pd.7
  Bottom Layer w0.5: v1(46.482,40.132) 46.546,40.196 54.42,40.196 v1(54.483,40.259) ; v1(54.483,52.578) v1(73.406,52.578)
PB12: OP3.4 Pc.1 R75.1 | length 31.1
  Top Layer w0.5: R75.1 OP3.4 71.501,29.972 72.517,30.988 83.312,30.988 84.328,32.004 Pc.1
PB13: OP4.4 Pc.2 R77.1 | length 24.9
  Top Layer w0.5: R77.1 OP4.4 80.391,28.448 81.153,29.21 85.852,29.21 86.868,30.226 Pc.2
PB14: Pc.3 Q7.3 R63.2 | length 37.4
  Top Layer w0.3: 85.598,43.18 88.773,43.18
  Top Layer w0.5: Pc.3 85.598,43.18 ; 88.773,43.18 89.662,42.291 89.662,26.416 91.313,24.765 91.313,22.43 92.978,20.765 ; R63.2@92.978,17.54 92.978,20.765 ; Q7.3@97.688,21.654 93.867,21.654 92.978,20.765
PB15: Pc.4 Q8.3 R66.2 | length 51.8
  Top Layer w0.5: R66.2 105.968,20.638 106.857,21.527 ; v1(106.045,45.212) 106.045,22.339 106.857,21.527 ; Q8.3 106.857,21.527
  Bottom Layer w0.5: Pc.4 89.154,44.45 89.916,45.212 v1(106.045,45.212)
PC6: Pc.5 R43.1 | length 74.4
  Top Layer w0.5: R43.1 v1(26.26,34.798) ; v1(59.944,34.798) v1(59.944,46.99)
  Bottom Layer w0.5: v1(26.26,34.798) v1(59.944,34.798) ; v1(59.944,46.99) Pc.5
PC7: Pc.6 R46.1 | length 89.5
  Top Layer w0.5: R46.1 v1(12.798,33.401) ; v1(61.214,33.401) v1(61.214,45.72)
  Bottom Layer w0.3: 81.888,45.72 85.598,45.72
  Bottom Layer w0.5: v1(12.798,33.401) v1(61.214,33.401) ; v1(61.214,45.72) 81.888,45.72 ; 85.598,45.72 Pc.6
PC8: Pc.7 R49.1 | length 83.6
  Top Layer w0.5: R49.1 v1(19.529,37.338) ; v1(57.15,37.338) v1(57.15,49.53)
  Bottom Layer w0.5: v1(19.529,37.338) v1(57.15,37.338) ; v1(57.15,49.53) Pc.7
PC9: Pc.8 R52.1 | length 72
  Top Layer w0.5: R52.1 v1(32.991,36.068) ; v1(58.547,36.068) v1(58.547,48.26)
  Bottom Layer w0.3: 81.788,48.26 85.498,48.26
  Bottom Layer w0.5: v1(32.991,36.068) v1(58.547,36.068) ; v1(58.547,48.26) 81.788,48.26 ; 85.498,48.26 86.768,49.53 Pc.8
PREF: CE6.1 JP2.1 R5.1 R11.1 R17.1 R22.1 R26.1 R30.1 R34.1 R38.1 R42.1 R68.1 R78.1 U3.2 | length 177.3
  Top Layer w0.5: JP2.1 115.941,9.896 116.586,10.541 R5.1 118.237,16.764 118.618,16.383 U3.2 ; CE6.1 121.548,32.14 ; v1(122.555,22.733) 122.555,31.133 121.548,32.14 ; v1(125.349,54.61) 127.156,54.61 R11.1 ; R17.1 123.542,73.377 122.555,72.39 v1(122.555,54.61) 122.555,33.147 121.548,32.14 ; R68.1 v1(138.782,13.716) R78.1 ; v1(146.529,17.526) R22.1 ; v1(154.149,17.526) R26.1 ; v1(161.798,17.526) R30.1 ; v1(169.516,17.526) R34.1 ; v1(177.263,17.526) R38.1 ; v1(184.785,17.526) R42.1
  Bottom Layer w0.5: U3.2 124.206,16.383 ; v1(122.555,22.733) 124.421,22.733 124.714,22.44 124.714,16.891 124.206,16.383 ; v1(122.555,54.61) v1(125.349,54.61) ; v1(184.785,17.526) v1(177.263,17.526) v1(169.516,17.526) v1(161.798,17.526) v1(154.149,17.526) v1(146.529,17.526) 139.319,17.526 138.782,16.989 v1(138.782,13.716) 138.782,11.401 138.303,10.922 125.222,10.922 124.714,11.43 124.714,15.875 124.206,16.383
Q1B: JP8.2 R61.1 | length 15.6
  Top Layer w0.5: R61.1 89.985,10.853 90.424,10.414 97.917,10.414 98.722,9.609 JP8.2
Q1C: JP9.2 R48.2 | length 13.6
  Top Layer w0.5: R48.2 12.798,10.697 13.843,9.652 18.923,9.652 19.808,8.767 JP9.2
Q2B: JP8.3 R64.1 | length 7.7
  Top Layer w0.5: JP8.3 102.702,9.611 102.939,9.848 R64.1
Q2C: JP9.3 R51.2 | length 11.3
  Top Layer w0.5: R51.2 19.529,11.088 19.822,10.795 23.114,10.795 23.788,10.121 JP9.3
Q3C: JP9.4 R45.2 | length 8.2
  Top Layer w0.5: R45.2 26.26,10.951 27.768,9.443 JP9.4
Q4C: JP9.5 R54.2 | length 8.1
  Top Layer w0.5: JP9.5 31.748,9.777 32.991,11.02 R54.2
Q5C: JP9.6 R57.2 | length 10.5
  Top Layer w0.5: JP9.6 35.728,9.566 36.703,10.541 38.862,10.541 39.722,11.401 R57.2
Q6C: JP9.7 R60.2 | length 19
  Top Layer w0.5: JP9.7 39.708,8.593 40.513,9.398 45.847,9.398 46.453,10.004 R60.2 46.453,19.148
REFa: C11.1 POT2.3 U5.5 | length 39.3
  Top Layer w0.5: C11.1 156.083,50.673 157.734,49.022 U5.5
  Bottom Layer w0.5: POT2.3 136.027,52.441 141.097,47.371 144.526,47.371 147.701,50.546 153.543,50.546 155.067,49.022 U5.5
REFb: C18.1 POT4.3 U6.5 | length 39.3
  Top Layer w0.5: C18.1 156.21,69.469 157.861,67.818 U6.5
  Bottom Layer w0.5: POT4.3 136.154,71.237 141.224,66.167 144.653,66.167 147.828,69.342 154.051,69.342 155.575,67.818 U6.5
RG1a: R9.1 U5.1 | length 34.6
  Bottom Layer w0.5: R9.1 137.287,58.928 138.049,59.69 166.624,59.69 167.64,58.674 U5.1
RG1b: R15.1 U6.1 | length 36
  Bottom Layer w0.5: R15.1 137.414,78.232 138.176,78.994 167.259,78.994 167.767,78.486 U6.1
RG2a: POT1.2 POT1.3 U5.8 | length 21.9
  Top Layer w0.5: POT1.2 POT1.3
  Bottom Layer w0.5: POT1.3 152.918,52.461 157.099,56.642 U5.8
RG2b: POT3.2 POT3.3 U6.8 | length 21.9
  Top Layer w0.5: POT3.2 POT3.3
  Bottom Layer w0.5: POT3.3 153.045,71.257 157.226,75.438 U6.8
RS: Pb.7
SD-CLK: JP4.4 Pb.5 | length 61.4
  Top Layer w0.3: 77.216,61.303 77.216,72.136
  Top Layer w0.5: v1(77.216,40.513) 77.216,61.303 ; 77.216,72.136 79.375,74.295 v1(85.404,74.295)
  Bottom Layer w0.5: Pb.5 68.326,39.878 68.961,40.513 v1(77.216,40.513) ; v1(85.404,74.295) JP4.4
SD-DI: JP4.3 Pd.9 | length 34.1
  Top Layer w0.3: 72.136,64.262 72.136,67.972
  Top Layer w0.5: Pd.9 72.136,64.262 ; 72.136,67.972 72.136,74.803 76.581,79.248 86.614,79.248 88.004,80.638 JP4.3
SD-DO: JP4.2 Pd.8 | length 32.1
  Top Layer w0.5: Pd.8 73.406,73.406 77.597,77.597 88.519,77.597 90.604,79.682 JP4.2
SWCLK: Pd.1
SWDIO: Pc.14
USART1-RX: JP6.3 Pd.11 | length 22.2
  Top Layer w0.3: 69.596,64.262 69.596,67.972
  Top Layer w0.5: Pd.11 69.596,64.262 ; 69.596,67.972 69.596,77.851 71.076,79.331 JP6.3
USART1-TX: JP6.1 Pd.10 | length 20.8
  Top Layer w0.5: Pd.10 70.866,76.327 76.276,81.737 JP6.1
V_BAT: Pa.1
VDDA: Pa.13
VSN: JP3a.1 R7.1 | length 20.4
  Top Layer w0.5: R7.1@174.117,47.488 174.117,45.456 174.625,44.948 187.325,44.948 187.833,45.456 JP3a.1
VSP: JP3a.3 R8.1 | length 9.3
  Top Layer w0.5: R8.1@178.562,57.607 JP3a.3
pads on no net: M1.1 M2.1 M3.1 M4.1 M5.1 M6.1 M7.1 OP1.3 OP1.6 OP2.3 OP2.6 OP3.3 OP3.6 OP4.3 OP4.6 Pa.7 Pd.12 U2.1 U2.6 U2.7 U3.3 U4.3

## Polygon pours and split planes (outlines as drawn)
AGND on Bottom Layer "NONET_L-01_P-001" (solid, pour order 5): 104.056,89.38 193.167,89.38 193.167,0.734 114.427,0.734 114.427,25.753 103.971,25.753
GND on Bottom Layer "NONET_L-01_P-001" (solid, pour order 0): 1.143,89.408 102.616,89.408 102.616,24.638 113.538,24.638 113.538,0.762 1.143,0.762
AGND on Top Layer "NONET_L-01_P-001" (solid, pour order 3): 104.098,89.408 193.167,89.408 193.167,0.762 114.427,0.762 114.427,25.781 104.013,25.781
GND on Top Layer "NONET_L-01_P-001" (solid, pour order 2): 1.143,89.408 102.616,89.408 102.616,24.638 113.538,24.638 113.538,0.762 1.143,0.762

## Other copper
Top Layer:
  rectangle net GND: 16.512,80.408 32.512,89.408
  pour cut-out: 1.171,0.226 9.426,0.226 9.426,8.481 1.171,8.481
  pour cut-out: 185.829,0.099 194.084,0.099 194.084,8.354 185.829,8.354
  pour cut-out: 185.575,81.125 193.83,81.125 193.83,89.38 185.575,89.38
  pour cut-out: 1.143,24.653 9.398,24.653 9.398,32.908 1.143,32.908
  pour cut-out: 95.843,24.653 104.098,24.653 104.098,32.908 95.843,32.908
  pour cut-out: 95.843,81.153 104.098,81.153 104.098,89.408 95.843,89.408
  pour cut-out: 1.143,81.153 9.398,81.153 9.398,89.408 1.143,89.408
Bottom Layer:
  rectangle net GND: 16.512,80.408 32.512,89.408
  pour cut-out: 1.171,8.481 1.171,0.226 9.426,0.226 9.426,8.481
  pour cut-out: 185.829,8.354 185.829,0.099 194.084,0.099 194.084,8.354
  pour cut-out: 185.575,89.38 185.575,81.125 193.83,81.125 193.83,89.38
  pour cut-out: 1.143,32.908 1.143,24.653 9.398,24.653 9.398,32.908
  pour cut-out: 95.843,32.908 95.843,24.653 104.098,24.653 104.098,32.908
  pour cut-out: 95.843,89.408 95.843,81.153 104.098,81.153 104.098,89.408
  pour cut-out: 1.143,89.408 1.143,81.153 9.398,81.153 9.398,89.408

## Silkscreen, mask and mechanical layers (free items; w line width, h text height)
Top Overlay:
  lines w0.1: 11.557,26.135 2.794,26.162 2.794,87.757 102.616,87.757 102.616,26.162 50.927,26.162
  text "I2C" at 63.292,88.311 h1.3
  text "USART" at 70.912,88.311 h1.3
  text "SPI" at 85.517,88.311 h1.3
  text "AuxBoard030624" at 124.079,87.376 h1.3
  text "www.nekoorad.com" at 122.347,85.39 h1.5
  text "09191143937" at 124.633,83.231 h1.5
  text "GND" at 80.826,79.575 h1 r90
  text "3V3" at 94.061,79.167 h1.3 r90
  text "GND" at 65.105,77.77 h1.3 r90
  text "GND" at 74.249,77.77 h1.3 r90
  text "PB5-DI" at 88.7,77.543 h1 r90
  text "PA4-CS" at 83.366,76.908 h1 r90
  text "PB4-DO" at 90.732,76.908 h1 r90
  text "ISP" at 185.374,76.5 h1.3 r90
  text "PA5-CLK" at 86.033,76.019 h1 r90
  text "PB7-Rx" at 71.455,75.611 h1.3 r90
  text "PB6-Tx" at 77.043,75.611 h1.3 r90
  text "PB9-SDA" at 62.615,75.434 h1.1 r90
  text "PB8-SCL" at 67.822,75.434 h1.1 r90
  text "12V" at 10.114,73.452 h1.3 r90
  text "PB2" at 192.613,70.785 h1.3 r90
  text "AGND" at 185.12,69.642 h1.3 r90
  text "GND" at 10.114,68.626 h1.3 r90
  text "ISN" at 185.12,65.197 h1.3 r90
  text "12V" at 10.114,64.562 h1.3 r90
  text "GND" at 10.114,59.863 h1.3 r90
  text "VSP" at 185.501,57.323 h1.3 r90
  text "5V" at 10.114,56.434 h1.3 r90
  text "PC5" at 192.613,51.862 h1.3 r90
  text "AGND" at 185.374,51.227 h1.3 r90
  text "VSN" at 185.374,46.909 h1.3 r90
  text "PC15" at 57.958,10.333 h1.3
  text "PB11" at 66.086,10.333 h1.3
  text "PB13" at 81.707,10.333 h1.3
  text "PB12" at 73.833,10.206 h1.3
  text "5V" at 153.878,8.682 h1.3 r90
  text "AGND" at 180.132,8.682 h1.3
  text "5V" at 16.591,8.555 h1.3 r90
  text "PREF" at 113.076,8.555 h1.3
  text "AGND" at 118.156,8.555 h1.3
  text "NREF" at 124.125,8.555 h1.3
  text "PC7" at 20.274,8.428 h1.3 r90
  text "PC8" at 24.338,8.428 h1.3 r90
  text "PC6" at 28.275,8.428 h1.3 r90
  text "PC9" at 32.466,8.428 h1.3 r90
  text "PA15" at 36.403,8.428 h1.1 r90
  text "PB3" at 40.34,8.428 h1.3 r90
  text "PA3" at 131.237,8.428 h1.3
  text "AGND" at 136.19,8.428 h1.3
  text "PB1" at 143.048,8.428 h1.3
  text "PA4" at 157.688,8.428 h1.3 r90
  text "PA6" at 161.752,8.428 h1.3 r90
  text "PA0" at 165.689,8.428 h1.3 r90
  text "PA1" at 169.88,8.428 h1.3 r90
  text "PB0" at 173.817,8.428 h1.3 r90
  text "PC4" at 177.881,8.428 h1.3 r90
  text "5V" at 95.381,8.378 h1.1 r90
  text "PB14" at 99.318,8.378 h1.1 r90
  text "PB15" at 103.255,8.378 h1.1 r90
  text "GND" at 107.446,8.378 h1.1 r90
  text "GND" at 44.404,8.301 h1.3 r90
  text "A" at 57.323,8.301 h1.3
  text "K" at 61.133,8.301 h1.3
  text "A" at 81.072,8.301 h1.3
  text "K" at 84.882,8.301 h1.3
  text "A" at 65.197,8.174 h1.3
  text "K" at 69.007,8.174 h1.3
  text "A" at 73.198,8.174 h1.3
  text "K" at 77.008,8.174 h1.3
  text "ANALOG" at 163.749,1.189 h1.3
  text "NTC" at 137.079,0.935 h1.3
  text "OUTPUT" at 27.224,0.808 h1.3
  text "ISO INPUT" at 68.88,0.808 h1.3
  text "INPUT" at 99.106,0.808 h1.3
Bottom Overlay:
  text "PA4-CS" at 83.62,82.35 h1 r90
  text "PA5-CLK" at 86.16,82.35 h1 r90
  text "PB5-DI" at 88.827,82.35 h1 r90
  text "PB4-DO" at 91.494,82.35 h1 r90
  text "GND" at 80.953,82.223 h1 r90
  text "PB6-Tx" at 77.112,82.164 h1.3 r90
  text "PB9-SDA" at 62.565,82.123 h1.3 r90
  text "PB8-SCL" at 67.772,82.123 h1.3 r90
  text "PB7-Rx" at 71.836,82.123 h1.3 r90
  text "3V3" at 94.061,82.123 h1.3 r90
  text "USART" at 74.376,79.837 h1.3 r90
  text "I2C" at 65.613,78.405 h1.3
  text "PB2" at 185.501,78.151 h1.3
  text "ISP" at 184.993,76.916 h1.3 r90
  text "SPI" at 81.742,74.595 h1.3
  text "12V" at 11.765,73.452 h1.3
  text "AGND" at 185.628,71.674 h1.3
  text "ISN" at 184.739,69.55 h1.3 r90
  text "GND" at 11.511,69.515 h1.3
  text "GND" at 11.511,69.515 h1.3
  text "12V" at 11.765,65.578 h1.3
  text "OFFSETb" at 134.574,63.927 h1.3
  text "GAINb" at 145.369,63.927 h1.3
  text "GND" at 11.511,61.514 h1.3
  text "PC5" at 185.501,60.244 h1.3
  text "VSP" at 185.12,59.263 h1.3 r90
  text "5V" at 11.003,57.577 h1.3
  text "AGND" at 185.628,53.005 h1.3
  text "VSN" at 184.993,51.135 h1.3 r90
  text "OFFSETa" at 134.32,45.258 h1.3
  text "GAINa" at 145.369,45.258 h1.3
  text "OUTPUT" at 33.609,13.889 h1.3
  text "INPUT" at 103.713,13.889 h1.3
  text "ANALOG" at 171.531,13.889 h1.3
  text "ISO INPUT" at 76.154,13.254 h1.3
  text "AGND" at 181.437,12.781 h1.3 r90
  text "PB14" at 99.395,12.654 h1.3 r90
  text "PB15" at 103.332,12.654 h1.3 r90
  text "PA4" at 157.561,12.146 h1.3 r90
  text "PA6" at 161.625,12.146 h1.3 r90
  text "PA0" at 165.562,12.146 h1.3 r90
  text "PA1" at 169.753,12.146 h1.3 r90
  text "PB0" at 173.69,12.146 h1.3 r90
  text "PC4" at 177.754,12.146 h1.3 r90
  text "GND" at 44.404,11.765 h1.3 r90
  text "5V" at 153.751,11.765 h1.3 r90
  text "PC7" at 20.324,11.688 h1.1 r90
  text "PC8" at 24.388,11.688 h1.1 r90
  text "PC6" at 28.325,11.688 h1.1 r90
  text "PC9" at 32.516,11.688 h1.1 r90
  text "PA15" at 36.453,11.688 h1.1 r90
  text "PB3" at 40.39,11.688 h1.1 r90
  text "GND" at 107.523,11.638 h1.3 r90
  text "NTC" at 140.162,11.349 h1.3
  text "5V" at 16.591,11.13 h1.3 r90
  text "5V" at 95.458,10.749 h1.3 r90
  text "PC15" at 61.93,10.46 h1.3
  text "PB13" at 85.679,10.46 h1.3
  text "PB11" at 69.804,10.333 h1.3
  text "PB12" at 77.805,10.333 h1.3
  text "AGND" at 122.509,8.555 h1.3
  text "NREF" at 127.716,8.555 h1.3
  text "PA3" at 134.32,8.555 h1.3
  text "AGND" at 141.051,8.555 h1.3
  text "PB1" at 145.242,8.555 h1.3
  text "A" at 58.374,8.428 h1.3
  text "K" at 62.184,8.428 h1.3
  text "A" at 82.123,8.428 h1.3
  text "K" at 85.933,8.428 h1.3
  text "PREF" at 116.794,8.428 h1.3
  text "A" at 66.248,8.301 h1.3
  text "K" at 70.058,8.301 h1.3
  text "A" at 74.249,8.301 h1.3
  text "K" at 78.059,8.301 h1.3
Mechanical 1:
  the board outline again, w0.254

## Text inside footprints (layer, text, board x,y; h text height)
Pa: Top Overlay "16" at 45.212,41.021 h1.3; Top Overlay "15" at 53.594,41.021 h1.3; Top Overlay "1" at 51.435,61.849 h1.3; Top Overlay "2" at 48.26,61.595 h1.3
Pb: Top Overlay "17" at 59.563,37.973 h1.3; Top Overlay "18" at 59.563,35.814 h1.3; Top Overlay "32" at 82.931,35.56 h1.3; Top Overlay "31" at 82.677,37.846 h1.3
Pc: Top Overlay "48" at 86.106,61.468 h1.2; Top Overlay "47" at 83.439,61.468 h1.2; Top Overlay "34" at 88.773,41.148 h1.3; Top Overlay "33" at 80.518,41.148 h1.3
Pd: Top Overlay "50" at 82.931,65.405 h1.2; Top Overlay "49" at 82.931,63.5 h1.2; Top Overlay "63" at 59.436,62.23 h1.3; Top Overlay "64" at 59.436,65.024 h1.3
U3: Bottom Overlay "-" at 122.428,14.097 h1 r90; Bottom Overlay "T" at 122.428,19.304 h1 r90; Bottom Overlay "+" at 122.428,16.637 h1 r90
U4: Bottom Overlay "-" at 130.556,14.097 h1 r90; Bottom Overlay "T" at 130.556,19.304 h1 r90; Bottom Overlay "+" at 130.556,16.637 h1 r90